# Altium PCB PCB.PcbDoc
Units mil, origin at the board's own origin, x right, y up, seen from the top; angles counter-clockwise.
Board outline 2707.65 x 2109.42 mil, 2 copper layers (Top Layer, Bottom Layer), stack 12.8 mil thick; 33 components, 46 nets, 155 pads, 0 vias.
Unrouted connection lines stored in the file: 7.
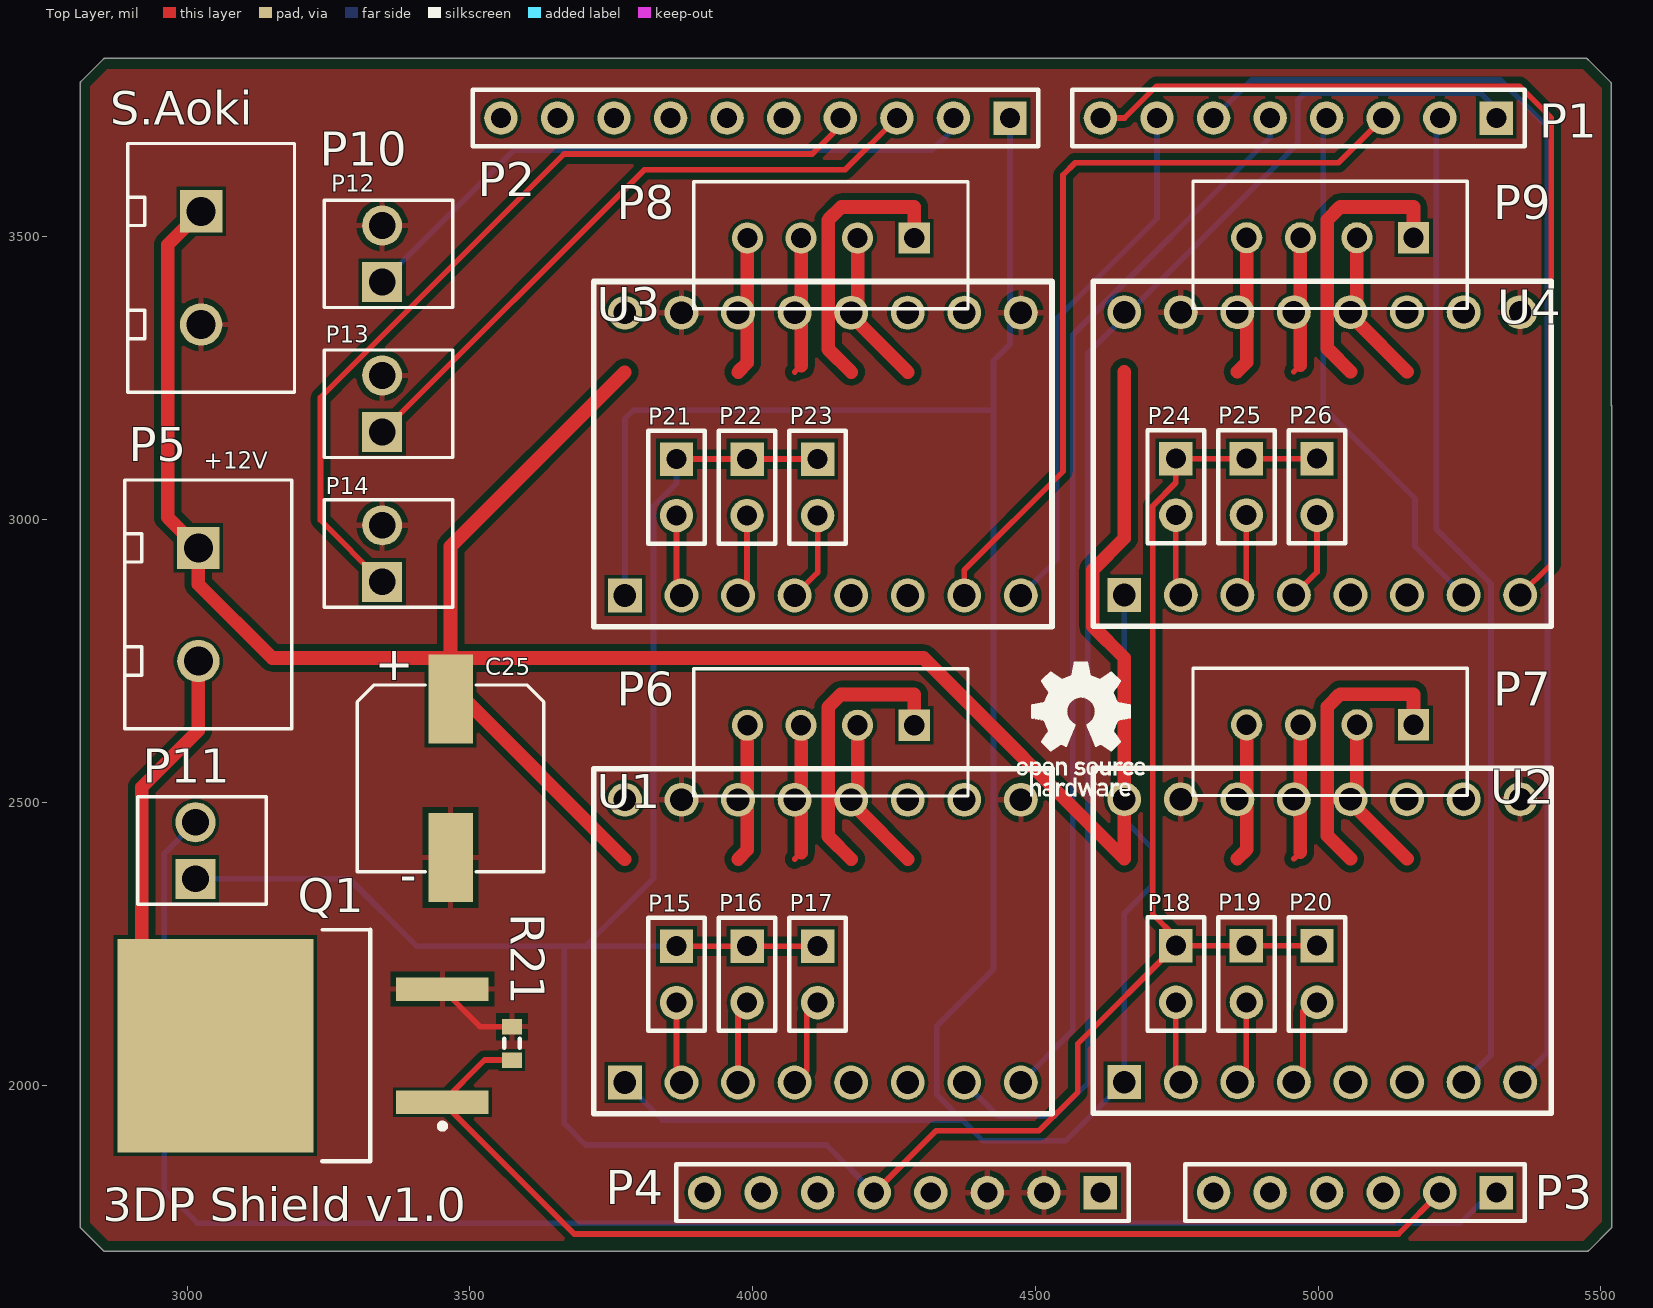
[diagram p0: Top Layer view]
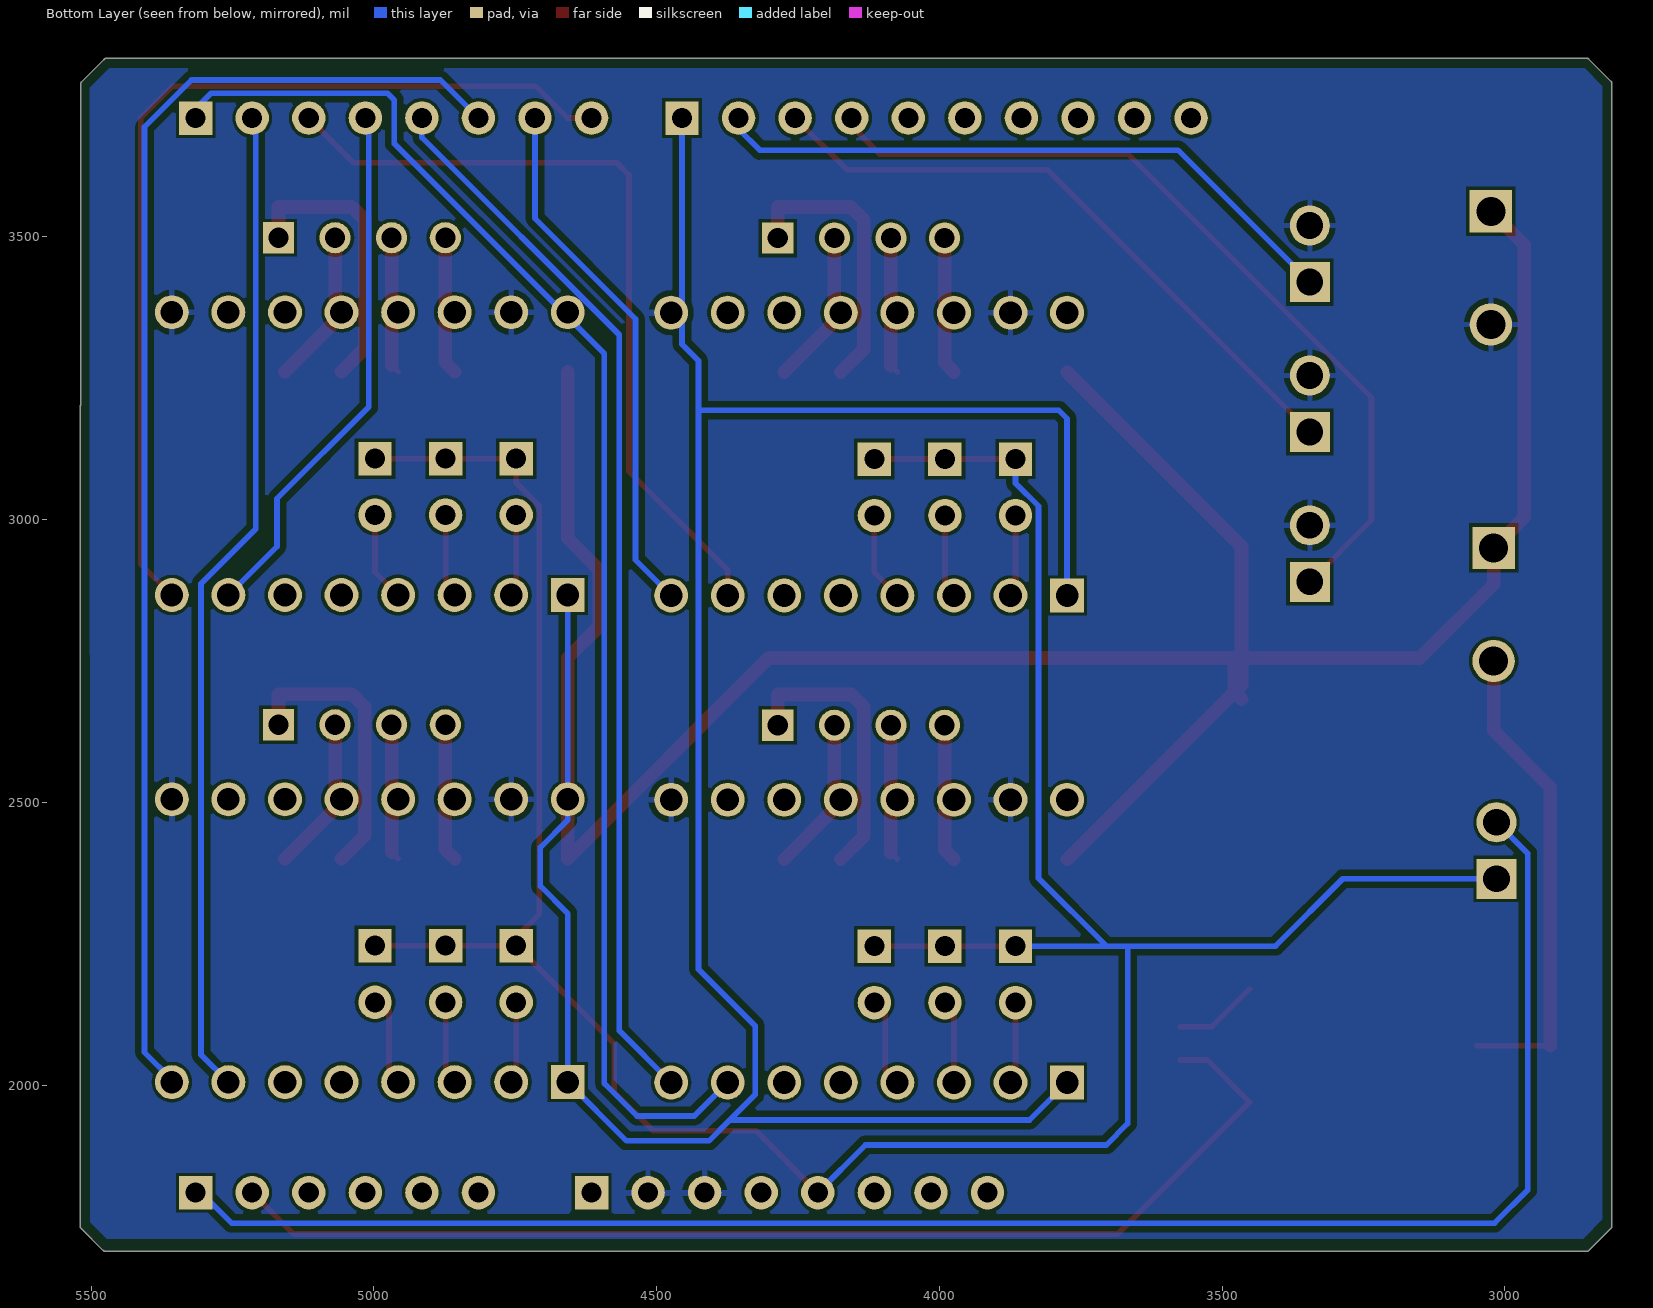
[diagram p1: Bottom Layer view, seen from below]

## Layer stack, top to bottom
Top Solder: solder mask 0.4, Solder Resist, Dk 3.5
Top Layer: signal copper 1.4
Dielectric 1: core 10, FR-4, Dk 4.2
Bottom Layer: signal copper 1.4
Bottom Solder: solder mask 0.4, Solder Resist, Dk 3.5

## Board outline
2812.46,1747.21 cw(c2815.25,1750) 2811.3,1750 2811.3,3772.01 cw(c2815.25,3772.01) 2812.46,3774.81 2852.21,3814.56 cw(c2855,3811.76) 2855,3815.72 5473.24,3815.72 cw(c5473.24,3811.76) 5476.77,3813.53 cw(c5475,3810) 5477.79,3812.79 5516.91,3773.68 cw(c5514.12,3770.88) 5518.07,3770.88 5518.07,3202.74 cw(c5515,3200.25) 5518.95,3200.25 5518.95,1750 cw(c5515,1750) 5517.79,1747.21 5478.54,1707.96 cw(c5475.75,1710.75) 5477.26,1707.1 cw(c5475.25,1710.5) 5476.12,1706.64 cw(c5474.5,1710.25) 5474.5,1706.3 2855,1706.3 cw(c2855,1710.25) 2852.21,1707.46

## Design rules (kind name [scope] priority, off if disabled: settings)
Clearance Clearance_M1 [OnLayer('Mechanical 1')] p1: gap=11.81 ignorepadtopadclearanceinfootprint=FALSE
Clearance [All] p2: gap=6 ignorepadtopadclearanceinfootprint=FALSE except(11.81: Track-Poly)
ComponentClearance [All] p1: gap=0 collisioncheckmode=3 verticalgap=0 showdistances=FALSE
MinimumSolderMaskSliver [All] p1: minsoldermaskwidth=0
PlaneConnect [All] p1: pad.planeconnectstyle=Relief pad.reliefexpansion=20 pad.reliefentries=4 pad.reliefconductorwidth=10 pad.reliefairgap=10 via.planeconnectstyle=Direct via.reliefexpansion=20 via.reliefentries=4 via.reliefconductorwidth=10 via.reliefairgap=10
PolygonConnect [All] p1: connectstyle=Relief reliefconductorwidth=10 reliefentries=4 polygonreliefangle="90 Angle" airgapwidth=10
RoutingVias [All] p1: holewidth=28 width=50 viastyle="Through Hole" minholewidth=28 minwidth=50 maxholewidth=28 maxwidth=50
SilkToSilkClearance [All] p1: silktosilkclearance=0
SilkToSolderMaskClearance [IsPad] p1: minsilkscreentomaskgap=1 clearancetoexposedcopper=TRUE
SolderMaskExpansion [All] p1: expansion=4
Width Width_Stepper_NetClass [InNetClass('Stepper')] p1: maxlimit=24 minlimit=10 preferedwidth=24
Width Width_Power_NetClass [InNetClass('Power')] p2: maxlimit=24 minlimit=10 preferedwidth=24 minimp=50.000000 maximp=50.000000 favimp=50.000000
Width [All] p3: maxlimit=10 minlimit=10 preferedwidth=10
25 further rules are at their usual default settings.

## Classes and differential pairs
net class Stepper: E8-1 E8-2 E8-3 E8-4 X8-1 X8-2 X8-3 X8-4 Y8-1 Y8-2 Y8-3 Y8-4 Z8-1 Z8-2 Z8-3 Z8-4
net class Power: +12V GND NetP5_2

## Components (designator, comment, footprint, x,y, rotation, side; value= is the part's Value field where it differs from the comment)
C25 "Cap_alumi_electrolytic" EEE-1HA101UP 3465.92,2402.71 r180 top
P1 "" HDR1X8 5315,3710 r180 top
P2 "" HDR1X10 4455,3710 r180 top
P3 "" HDR1X6 5315,1810 r180 top
P4 "" HDR1X8 4615,1810 r180 top
P5 "OSTTC02-0162" OSTTC02-0162 3020,2950 r270 top
P6 "B4B-XH-A(LF)(SN)" B4B-XH-A 4285.73,2636.52 r180 top
P7 "B4B-XH-A(LF)(SN)" B4B-XH-A 5168.53,2637.27 r180 top
P8 "B4B-XH-A(LF)(SN)" B4B-XH-A 4285.73,3497.7 r180 top
P9 "B4B-XH-A(LF)(SN)" B4B-XH-A 5168.53,3498.45 r180 top
P10 "OSTTC02-0162" OSTTC02-0162 3025,3545 r270 top
P11 "2204-1021" MOLEX_2204_1021 3015,2365 r90 top
P12 "2204-1021" MOLEX_2204_1021 3345,3420 r90 top
P13 "2204-1021" MOLEX_2204_1021 3345,3155 r90 top
P14 "2204-1021" MOLEX_2204_1021 3345,2890 r90 top
P15 "Header 2" HDR1X2 3865.39,2245.94 r270 top
P16 "Header 2" HDR1X2 3990.2,2245.94 r270 top
P17 "Header 2" HDR1X2 4115,2245.94 r270 top
P18 "Header 2" HDR1X2 4748.2,2246.7 r270 top
P19 "Header 2" HDR1X2 4873,2246.7 r270 top
P20 "Header 2" HDR1X2 4997.81,2246.7 r270 top
P21 "Header 2" HDR1X2 3865.39,3107.13 r270 top
P22 "Header 2" HDR1X2 3990.2,3107.13 r270 top
P23 "Header 2" HDR1X2 4115,3107.13 r270 top
P24 "Header 2" HDR1X2 4748.2,3107.88 r270 top
P25 "Header 2" HDR1X2 4873,3107.88 r270 top
P26 "Header 2" HDR1X2 4997.81,3107.88 r270 top
Q1 "AOB240L" DPAK254P1524X483-3N 3205.51,2070 r180 top
R21 "" J1-0603 3574.37,2074.08 r90 top value=10K
U1 "DRV8825" DRV8825 4474.25,2004.76 r90 top locked
U2 "DRV8825" DRV8825 5357.06,2005.51 r90 top locked
U3 "DRV8825" DRV8825 4474.25,2865.94 r90 top locked
U4 "DRV8825" DRV8825 5357.06,2866.69 r90 top locked

## Footprints (in the part's own frame and the unit in brackets; to place one, negate y for a bottom-side part, rotate by r counter-clockwise, add the part's x,y. Pads: shape width x height; smd on the part's side, far side on the other; paste and mask are expansions set on the pad)
B4B-XH-A [mm]
  rect 1.4x1.4 hole 0.905: 1(0,0)
  round 1.4 hole 0.905: 2(2.54,0) 3(5.08,0) 4(7.493,0)
  silkscreen extent -2.41,-2.54 9.91,3.18
DPAK254P1524X483-3N [mm] "D2-PAK, 3-Pads, Body 7.93x8.57mm (max), IPC Medium Density"
  rect 4.15x1.05 smd: 1(-6.25,2.54) 3(-6.25,-2.54)
  rect 8.8x9.6 smd: 4(3.95,0)
  silkscreen extent -6.38,-5.2 -0.85,5.2, body extent -3,-5.2 6.65,5.2, height 4.83
DRV8825 [mil]
  round 60 hole 40: A1(500,300) A2(500,200) B1(500,400) B2(500,500) DIR(0,0) FAULT(500,100) GND(500,600) GND(500,0) M0(0,600) M1(0,500) M2(0,400) RESET(0,300) SLEEP(0,200) STEP(0,100) VMOT(500,700)
  rect 60x60 hole 40: ENABLE(0,700)
  silkscreen extent -55,-55 555,755
EEE-1HA101UP [mm]
  rect 2x4 smd: 1(0,0) 2(0,-7.112)
  silkscreen extent -4.19,-7.75 4.19,0.64
HDR1X2 [mm] "Connector; Header; 2 Position"
  rect 1.5x1.5 hole 0.9: 1(0,0)
  round 1.5 hole 0.9: 2(2.54,0)
  silkscreen extent -1.27,-1.27 3.81,1.27
HDR1X6 [mm] "Connector; Header; 6 Position"
  rect 1.5x1.5 hole 0.9: 1(0,0)
  round 1.5 hole 0.9: 2(2.54,0) 3(5.08,0) 4(7.62,0) 5(10.16,0) 6(12.7,0)
  silkscreen extent -1.27,-1.27 13.97,1.27
HDR1X8 [mm] "Connector; Header; 8 Position"
  rect 1.5x1.5 hole 0.9: 1(0,0)
  round 1.5 hole 0.9: 2(2.54,0) 3(5.08,0) 4(7.62,0) 5(10.16,0) 6(12.7,0) 7(15.24,0) 8(17.78,0)
  silkscreen extent -1.27,-1.27 19.05,1.27
HDR1X10 [mm] "Connector; Header; 10 Position"
  rect 1.5x1.5 hole 0.9: 1(0,0)
  round 1.5 hole 0.9: 2(2.54,0) 3(5.08,0) 4(7.62,0) 5(10.16,0) 6(12.7,0) 7(15.24,0) 8(17.78,0) 9(20.32,0) 10(22.86,0)
  silkscreen extent -1.27,-1.27 24.13,1.27
J1-0603 [mm] "Chip Resistor, Body 1.6x0.8mm, IPC High Density"
  rect 0.7x0.9 smd: 1(-0.75,0) 2(0.75,0)
  silkscreen extent -0.2,-0.35 0.2,0.35, body extent -0.85,-0.48 0.85,0.48, height 0.9
MOLEX_2204_1021 [mm]
  rect 1.8x1.8 hole 1.2: 1(0,0)
  round 1.8 hole 1.2: 2(2.54,0)
  silkscreen extent -1.14,-3.17 3.68,2.6
OSTTC02-0162 [mm]
  rect 1.9x1.9 hole 1.3: 1(0,0)
  round 1.9 hole 1.3: 2(5.08,0)
  silkscreen extent -3.05,-3.3 8.13,4.19

## Part data
P1 P4: library part "Header 8", "Header, 8-Pin", LatestRevisionDate=17-Jul-2002, LatestRevisionNote="Re-released for DXP Platform.", Publisher="Altium Limited"
P2: library part "Header 10", "Header, 10-Pin", LatestRevisionDate=17-Jul-2002, LatestRevisionNote="Re-released for DXP Platform.", Publisher="Altium Limited"
P3: library part "Header 6", "Header, 6-Pin", LatestRevisionDate=17-Jul-2002, LatestRevisionNote="Re-released for DXP Platform.", Publisher="Altium Limited"
P5 P10: library part TERMINAL_BLOCK_1X2
P6 P7 P8 P9: library part XH_CONNECTOR_1X4
P11 P12 P13 P14: library part MOLEX_1X2_HEADER
P15 P16 P17 P18 P19 P20 P21 P22 P23 P24 P25 P26: "Header, 2-Pin", LatestRevisionDate=17-Jul-2002, LatestRevisionNote="Re-released for DXP Platform.", Publisher="Altium Limited"
R21: library part Res3, "Resistor", LatestRevisionDate=29-May-2009, LatestRevisionNote="IPC-7351 Footprint Added.", PackageDescription="Chip Resistor", PackageReference=J1-0603, Published=8-Jun-2000, Publisher="Altium Limited"
C25: =100uF

## Nets (pads, with @x,y where several pads share a name; then routed paths per layer and width w, separated by ;. In a path a pad name is that pad's centre, name@x,y a point inside that pad or via, vN(x,y) a via of type N, cw(c..) or ccw(c..) an arc to the next point about the centre after c; other vN are vias at no path point)
+3V3: P4.5 P11.1 P15.1 P16.1 P17.1 P18.1 P19.1 P20.1 P21.1 P22.1 P23.1 P24.1 P25.1 P26.1 | length 5396.9
  Top Layer w10: P15.1 P16.1 P17.1 ; P21.1 P22.1 P23.1 ; P4.5 4324.43,1919.43 4506.22,1919.43 4575.03,1988.24 4575.03,2073.53 P18.1 ; P20.1 P19.1 P18.1 ; P26.1 P25.1 P24.1 4748.2,3065.19 4707.67,3024.67 4707.67,2302.16 4748.2,2261.64 P18.1
  Bottom Layer w10: P11.1 3286.81,2365 3405.86,2245.94 3667.12,2245.94 ; P15.1 3704.84,2245.94 ; P21.1 3865.39,3064.44 3824.87,3023.91 3824.87,2365.97 3704.84,2245.94 ; P4.5 4130.55,1894.45 3704.84,1894.45 3667.12,1932.17 3667.12,2245.94 ; 3667.12,2245.94 3704.84,2245.94
+12V: C25.2 P5.1 P10.1 U1.VMOT U2.VMOT U3.VMOT U4.VMOT | length 4645.8
  Top Layer w24: P10.1 2966,3486 2966,3004 P5.1 3020,2886 3150.6,2755.4 C25.2@3465.92,2755.4 ; C25.2 C25.2@3478.32,2695.11 ; 3774.25,2399.76 3773.68,2399.76 C25.2@3478.32,2695.11 ; 3774.25,3260.94 3465.92,2952.6 C25.2@3465.92,2755.4 ; 4657.06,3261.69 4657.06,2966.95 4601.66,2911.55 4601.66,2811.29 4657.06,2755.89 4657.06,2400.51 4302.17,2755.4 C25.2@3478.32,2755.4 ; C25.2@3465.92,2755.4 C25.2@3478.32,2755.4 ; C25.2@3465.92,2755.4 3465.92,2707.52 C25.2@3478.32,2695.11 ; C25.2@3478.32,2695.11 C25.2@3478.32,2755.4
CK_A4: P3.2 Q1.1 R21.1 | length 2043.9
  Top Layer w10: R21.1 3526.12,2044.55 Q1.1 3684.66,1736.92 5141.92,1736.92 P3.2
E8-1: P9.1 U4.A1 | length 501.5
  Top Layer w24: 5057.06,3261.69 5016.25,3302.5 5016.25,3530.39 5038.64,3552.78 5168.53,3552.78 P9.1
E8-2: P9.2 U4.A2 | length 273.4
  Top Layer w24: P9.2 5068.53,3350.22 5157.06,3261.69
E8-3: P9.3 U4.B1 | length 241.5
  Top Layer w10: 4957.06,3261.69 4968.53,3273.17
  Top Layer w24: 4968.53,3273.17 P9.3
E8-4: P9.4 U4.B2 | length 243.6
  Top Layer w24: 4857.06,3261.69 4873.53,3278.17 P9.4
E-DIR: P1.8 U4.DIR | length 1730.2
  Top Layer w10: P1.8@4615,3690 P1.8 4657.69,3710 4714.21,3766.53 5355.71,3766.53 5412.24,3710 5412.24,2921.87 U4.DIR
E-EN: P2.1 U1.ENABLE U2.ENABLE U3.ENABLE U4.ENABLE | length 4683.7
  Bottom Layer w10: U1.ENABLE 3840.52,1938.49 4370.63,1938.49 ; U3.ENABLE 3774.25,3178.66 3788.75,3193.16 4425.85,3193.16 ; P2.1 4455,3310.14 4425.85,3280.99 4425.85,3193.16 ; U4.ENABLE 4657.06,2468.96 4705.46,2420.56 4705.46,2352.11 4657.06,2303.71 U2.ENABLE 4553.17,1901.62 4407.49,1901.62 4370.63,1938.49 ; 4370.63,1938.49 4325.85,1983.26 4325.85,2105.16 4327.3,2106.61 4425.85,2205.16 4425.85,3193.16
E-M0: P24.2 U4.M0 | length 144.9
  Top Layer w10: P24.2 4748.2,2875.55 U4.M0
E-M1: P25.2 U4.M1 | length 147.8
  Top Layer w10: U4.M1 4873,2882.64 P25.2
E-M2: P26.2 U4.M2 | length 158.1
  Top Layer w10: U4.M2 4997.81,2907.44 P26.2
E-STEP: P1.4 U4.STEP | length 948.8
  Bottom Layer w10: P1.4 5008.66,3703.66 5008.66,3199.62 5171.15,3037.13 5171.15,2952.6 U4.STEP
GND: C25.1 P4.2 P4.3 P10.2 P12.2 P13.2 P14.2 Q1.3 R21.2 U1.GND U2.GND U3.GND U4.GND | length 150.3
  Top Layer w10: Q1.3 3517.97,2103.6 R21.2
NetP5_2: P5.2 Q1.4 | length 851.4
  Top Layer w10: Q1.4@2920,2070 Q1.4
  Top Layer w24: Q1.4@2920,2070 2920,2527 3020,2627 P5.2
Vaux13: P3.1 P11.2 | length 3074.9
  Bottom Layer w10: P11.2 2959.88,2409.88 2959.88,1814.64 3018.38,1756.13 5251.44,1756.14 5305.31,1810 P3.1
X8-1: P6.1 U1.A1 | length 501.5
  Top Layer w24: 4174.25,2399.76 4133.44,2440.57 4133.44,2668.46 4155.84,2690.85 4285.73,2690.85 P6.1
X8-2: P6.2 U1.A2 | length 273.4
  Top Layer w24: P6.2 4185.73,2488.29 4274.25,2399.76
X8-3: P6.3 U1.B1 | length 241.5
  Top Layer w10: 4074.25,2399.76 4085.73,2411.23
  Top Layer w24: 4085.73,2411.23 P6.3
X8-4: P6.4 U1.B2 | length 243.6
  Top Layer w24: 3974.25,2399.76 3990.73,2416.23 P6.4
X-DIR: P1.5 U1.DIR | length 1887.8
  Bottom Layer w10: U1.DIR 4566.05,2096.55 4566.05,3326.8 4915,3675.75 P1.5
X-M0: P15.2 U1.M0 | length 144.9
  Top Layer w10: P15.2 3865.39,2013.62 U1.M0
X-M1: P16.2 U1.M1 | length 147.8
  Top Layer w10: U1.M1 3974.25,2130 P16.2
X-M2: P17.2 U1.M2 | length 158.1
  Top Layer w10: U1.M2 4095.49,2026 4095.49,2126.43 P17.2
X-MAX: P2.2 P12.1 | length 1141.4
  Bottom Layer w10: P12.1 3578.26,3653.26 4317.57,3653.26 4355,3690.68 P2.2
X-STEP: P1.1 U1.STEP | length 2543.3
  Bottom Layer w10: U1.STEP 4433.42,1945.59 4534.95,1945.59 4592.31,2002.95 4592.31,3293.29 4963.78,3664.76 4963.78,3741.8 4976.1,3754.12 5287.4,3754.12 5315,3726.53 P1.1
Y8-1: P7.1 U2.A1 | length 501.5
  Top Layer w24: 5057.06,2400.51 5016.25,2441.32 5016.25,2669.21 5038.64,2691.6 5168.53,2691.6 P7.1
Y8-2: P7.2 U2.A2 | length 273.4
  Top Layer w24: P7.2 5068.53,2489.04 5157.06,2400.51
Y8-3: P7.3 U2.B1 | length 241.5
  Top Layer w10: 4957.06,2400.51 4968.53,2411.98
  Top Layer w24: 4968.53,2411.98 P7.3
Y8-4: P7.4 U2.B2 | length 243.6
  Top Layer w24: 4857.06,2400.51 4873.53,2416.98 P7.4
Y-DIR: P1.6 U2.DIR | length 2361.4
  Bottom Layer w10: P1.6 4882.22,3777.22 5322.39,3777.22 5405.46,3694.15 5405.46,2058.09 5357.06,2009.69 U2.DIR
Y-M0: P18.2 U2.M0 | length 144.9
  Top Layer w10: P18.2 4748.2,2014.37 U2.M0
Y-M1: P19.2 U2.M1 | length 147.8
  Top Layer w10: U2.M1 4873,2021.46 P19.2
Y-M2: P20.2 U2.M2 | length 163.5
  Top Layer w10: U2.M2 4973.02,2021.47 4973.02,2131.17 4988.55,2146.7 P20.2
Y-MAX: P2.3 P13.1 | length 1139.9
  Top Layer w10: P13.1 3808.58,3618.58 4163.58,3618.58 P2.3
Y-STEP: P1.2 U2.STEP | length 1780.8
  Top Layer w10: U2.STEP U2.STEP@5257.06,2019.09
  Bottom Layer w10: P1.2 5208.66,3703.66 5208.66,2983.55 5305.46,2886.74 5305.46,2053.91 U2.STEP
Z8-1: P8.1 U3.A1 | length 502.6
  Top Layer w24: 4174.25,3260.94 4133.44,3301.75 4133.44,3529.64 4156.59,3552.78 4285.73,3552.78 P8.1
Z8-2: P8.2 U3.A2 | length 273.4
  Top Layer w24: P8.2 4185.73,3349.47 4274.25,3260.94
Z8-3: P8.3 U3.B1 | length 241.5
  Top Layer w10: 4074.25,3260.94 4085.73,3272.41
  Top Layer w24: 4085.73,3272.41 P8.3
Z8-4: P8.4 U3.B2 | length 243.6
  Top Layer w24: 3974.25,3260.94 3990.73,3277.41 P8.4
Z-DIR: P1.7 U3.DIR | length 943.8
  Bottom Layer w10: U3.DIR 4537.26,2928.94 4537.26,3354.88 4715,3532.63 P1.7
Z-M0: P21.2 U3.M0 | length 144.9
  Top Layer w10: P21.2 3865.39,2874.8 U3.M0
Z-M1: P22.2 U3.M1 | length 147.8
  Top Layer w10: U3.M1 3990.2,2881.88 P22.2
Z-M2: P23.2 U3.M2 | length 158.1
  Top Layer w10: U3.M2 4115,2906.69 P23.2
Z-MAX: P2.4 P14.1 | length 1502.9
  Top Layer w10: P14.1 3235.93,2999.07 3235.93,3215.86 3666.55,3646.49 4105.38,3646.49 4155,3696.11 P2.4
Z-STEP: P1.3 U3.STEP | length 1423.6
  Top Layer w10: U3.STEP 4374.25,2910.79 4548.86,3085.39 4548.86,3609.38 4570.51,3631.03 5036.03,3631.03 P1.3
pads on no net: P2.5 P2.6 P2.7 P2.8 P2.9 P2.10 P3.3 P3.4 P3.5 P3.6 P4.1 P4.4 P4.6 P4.7 P4.8 U1.FAULT U1.RESET U1.SLEEP U2.FAULT U2.RESET U2.SLEEP U3.FAULT U3.RESET U3.SLEEP U4.FAULT U4.RESET U4.SLEEP

## Polygon pours and split planes (outlines as drawn)
GND on Top Layer "Top Layer-GND" (solid, remove dead copper, pour order 0): 2860.89,1725.35 5468.6,1725.35 5501.75,1758.5 5501.75,3762.44 5467.81,3796.06 2858.66,3796.06 2828.67,3766.06 2828.67,1757.14
GND on Bottom Layer "Bottom Layer-GND" (solid, pour order 2): 2861.97,1728.88 5472.28,1728.88 5500.97,1757.57 5502.24,3763.3 5467.63,3797.9 2859.36,3797.9 2827.96,3766.5 2828.12,1762.86

## Silkscreen, mask and mechanical layers (free items; w line width, h text height)
Top Overlay:
  drawing of 18 lines, arcs and shapes, not listed
  text "S.Aoki" at 2864.45,3697.83 h59.06
  text "+12V" at 3030,3090 h30
  text "3DP Shield v1.0" at 2851.37,1759.84 h59.06
Mechanical 1:
  lines w7.87: 2815.25,3770 2815.25,3772.01 ; 5473.24,3811.76 5416.43,3811.76 2855,3811.76 2815.25,3772.01 ; 5474.5,1710.25 5416.43,1710.25 2855,1710.25 2815.25,1750 2815.25,3772.01 ; 5475,3810 5514.12,3770.88 ; 5515,3771.48 5515,1910.25 5515,1750 5475.75,1710.75 5475,1710.75 ; 5475,1710.75 5475.25,1710.5 5475,1710.75
Mechanical 13:
  circle w0.5: c5315.25,1810.25 r10
  circle w0.5: c5215.25,1810.25 r10
  circle w0.5: c5115.25,1810.25 r10
  circle w0.5: c5015.25,1810.25 r10
  circle w0.5: c4915.25,1810.25 r10
  circle w0.5: c4815.25,1810.25 r10
  circle w0.5: c4615.25,1810.25 r10
  circle w0.5: c4515.25,1810.25 r10
  circle w0.5: c4415.25,1810.25 r10
  circle w0.5: c4315.25,1810.25 r10
  circle w0.5: c4215.25,1810.25 r10
  circle w0.5: c4115.25,1810.25 r10
  circle w0.5: c4015.25,1810.25 r10
  circle w0.5: c3915.25,1810.25 r10
  circle w0.5: c5315.25,3710.25 r10
  circle w0.5: c5215.25,3710.25 r10
  circle w0.5: c5115.25,3710.25 r10
  circle w0.5: c5015.25,3710.25 r10
  circle w0.5: c4915.25,3710.25 r10
  circle w0.5: c4815.25,3710.25 r10
  circle w0.5: c4715.25,3710.25 r10
  circle w0.5: c4615.25,3710.25 r10
  circle w0.5: c4456.43,3710.25 r10
  circle w0.5: c4356.43,3710.25 r10
  circle w0.5: c4256.43,3710.25 r10
  circle w0.5: c4156.43,3710.25 r10
  circle w0.5: c4056.43,3710.25 r10
  circle w0.5: c3956.43,3710.25 r10
  circle w0.5: c3856.43,3710.25 r10
  circle w0.5: c3756.43,3710.25 r10
  circle w0.5: c3656.43,3710.25 r10
  circle w0.5: c3556.43,3710.25 r10

## Dimensions
2745,3810 to 2675,1710 on Mechanical 13
5515,1645 to 2815,1590 on Mechanical 13

## Text inside footprints (layer, text, board x,y; h text height)
C25: Top Overlay "+" at 3400.92,2767.71 h60 r180; Top Overlay "-" at 3405.92,2387.71 h60 r180